# Altium PCB pcb_key.PcbDoc
Units mm, origin at the board's own origin, x right, y up, seen from the top; angles counter-clockwise.
Board outline 78 x 53 mm, 4 copper layers (Top Layer, Int1 (GND), Int2 (PWR), Bottom Layer), stack 1.585 mm thick; 55 components, 81 nets, 219 pads, 82 vias.
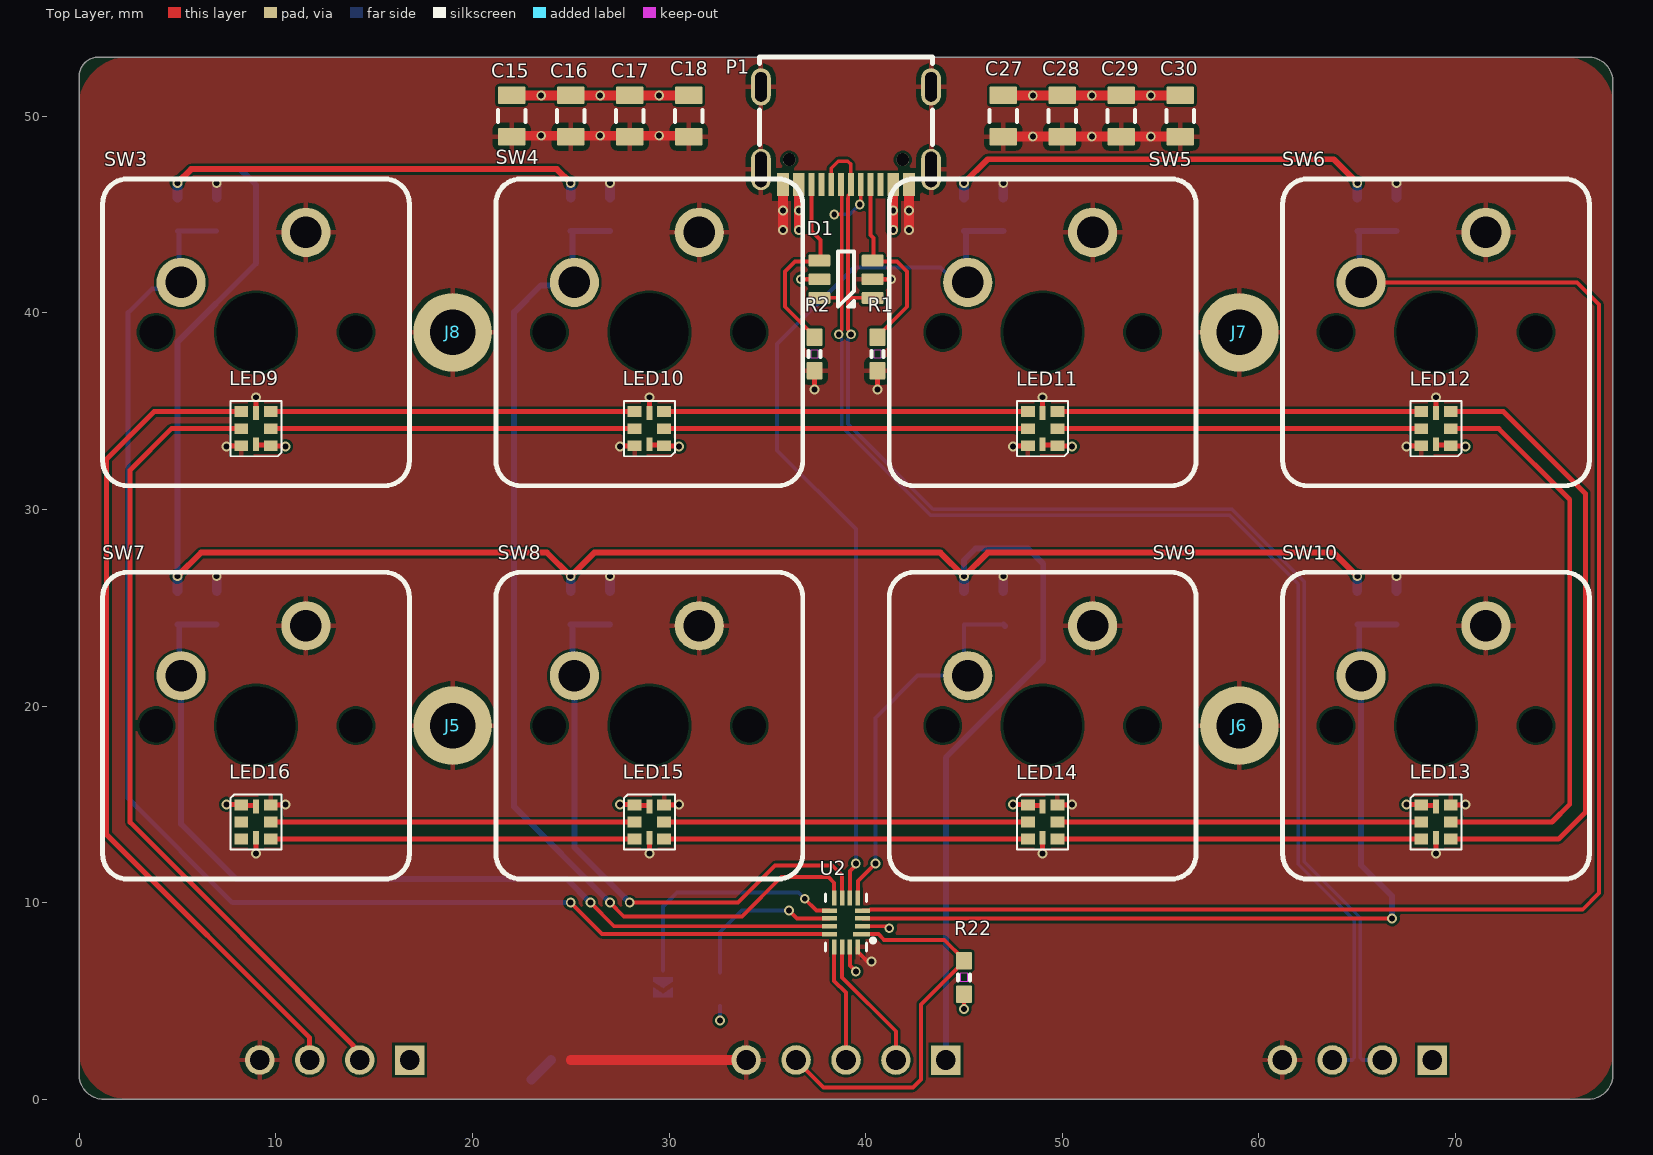
[diagram p0: Top Layer view]
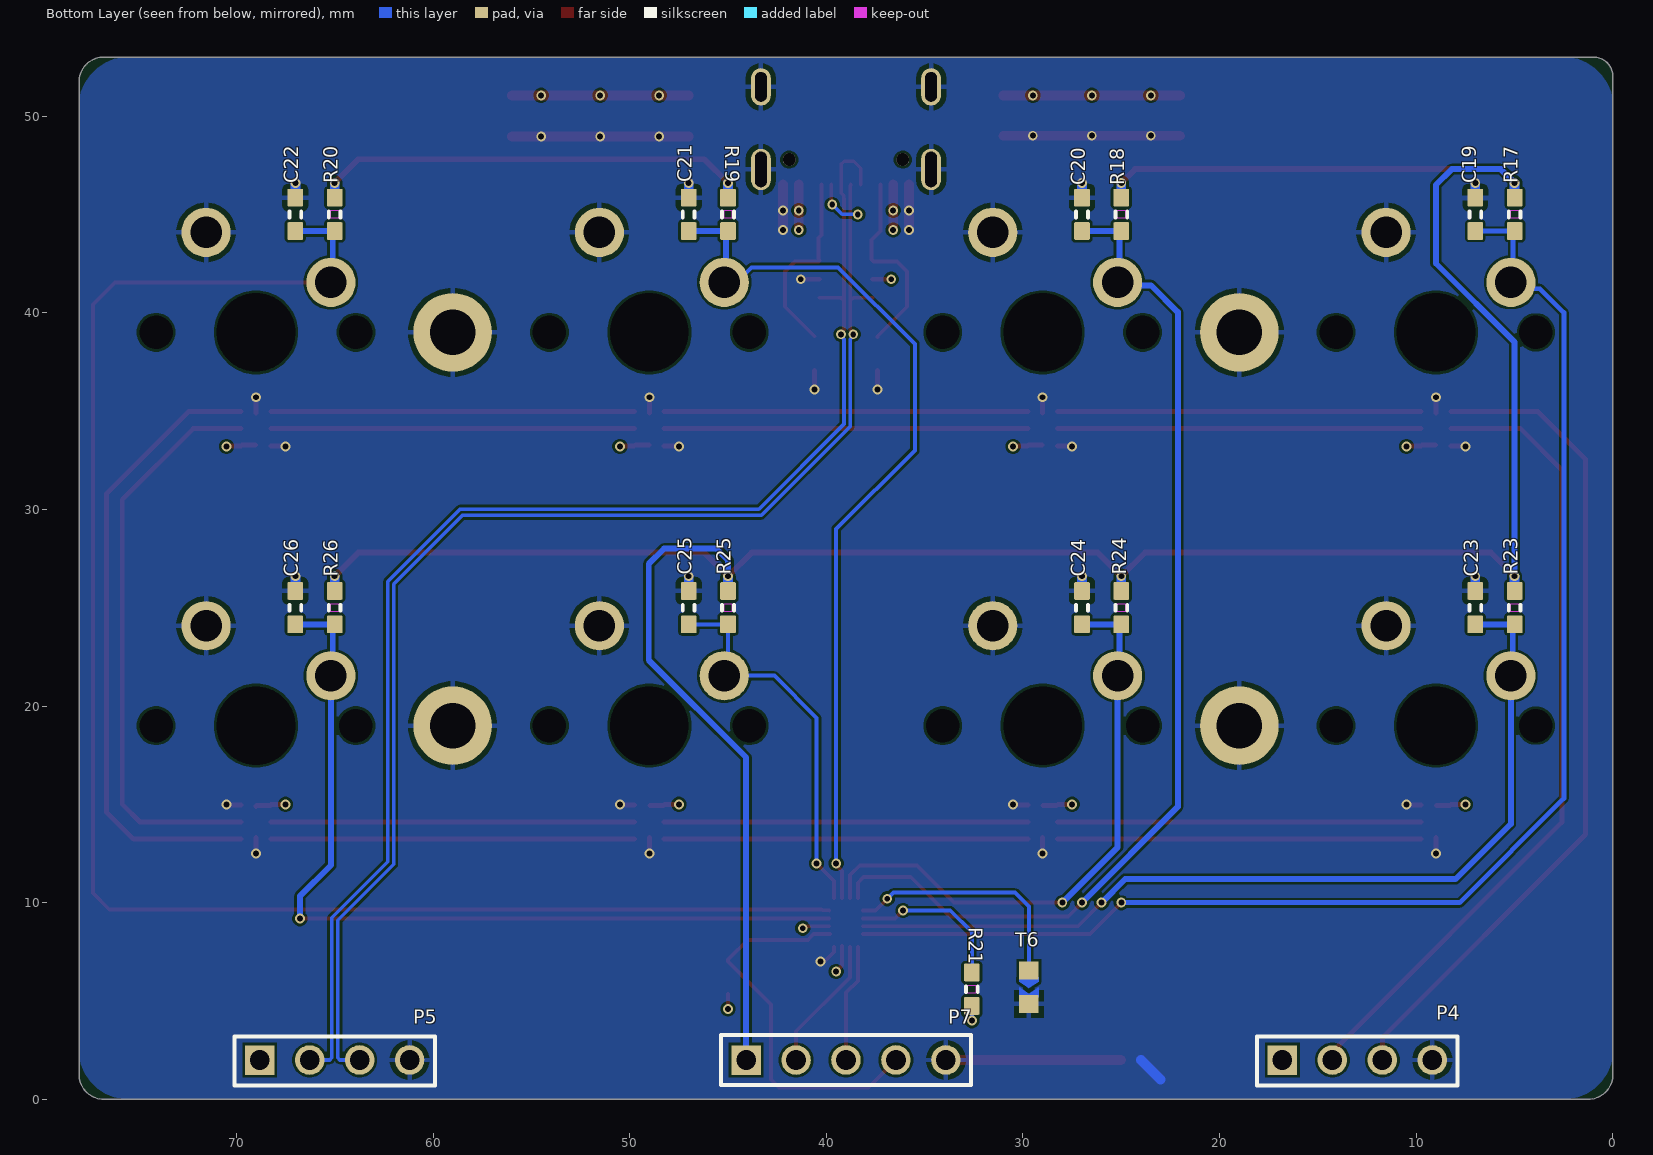
[diagram p1: Bottom Layer view, seen from below]
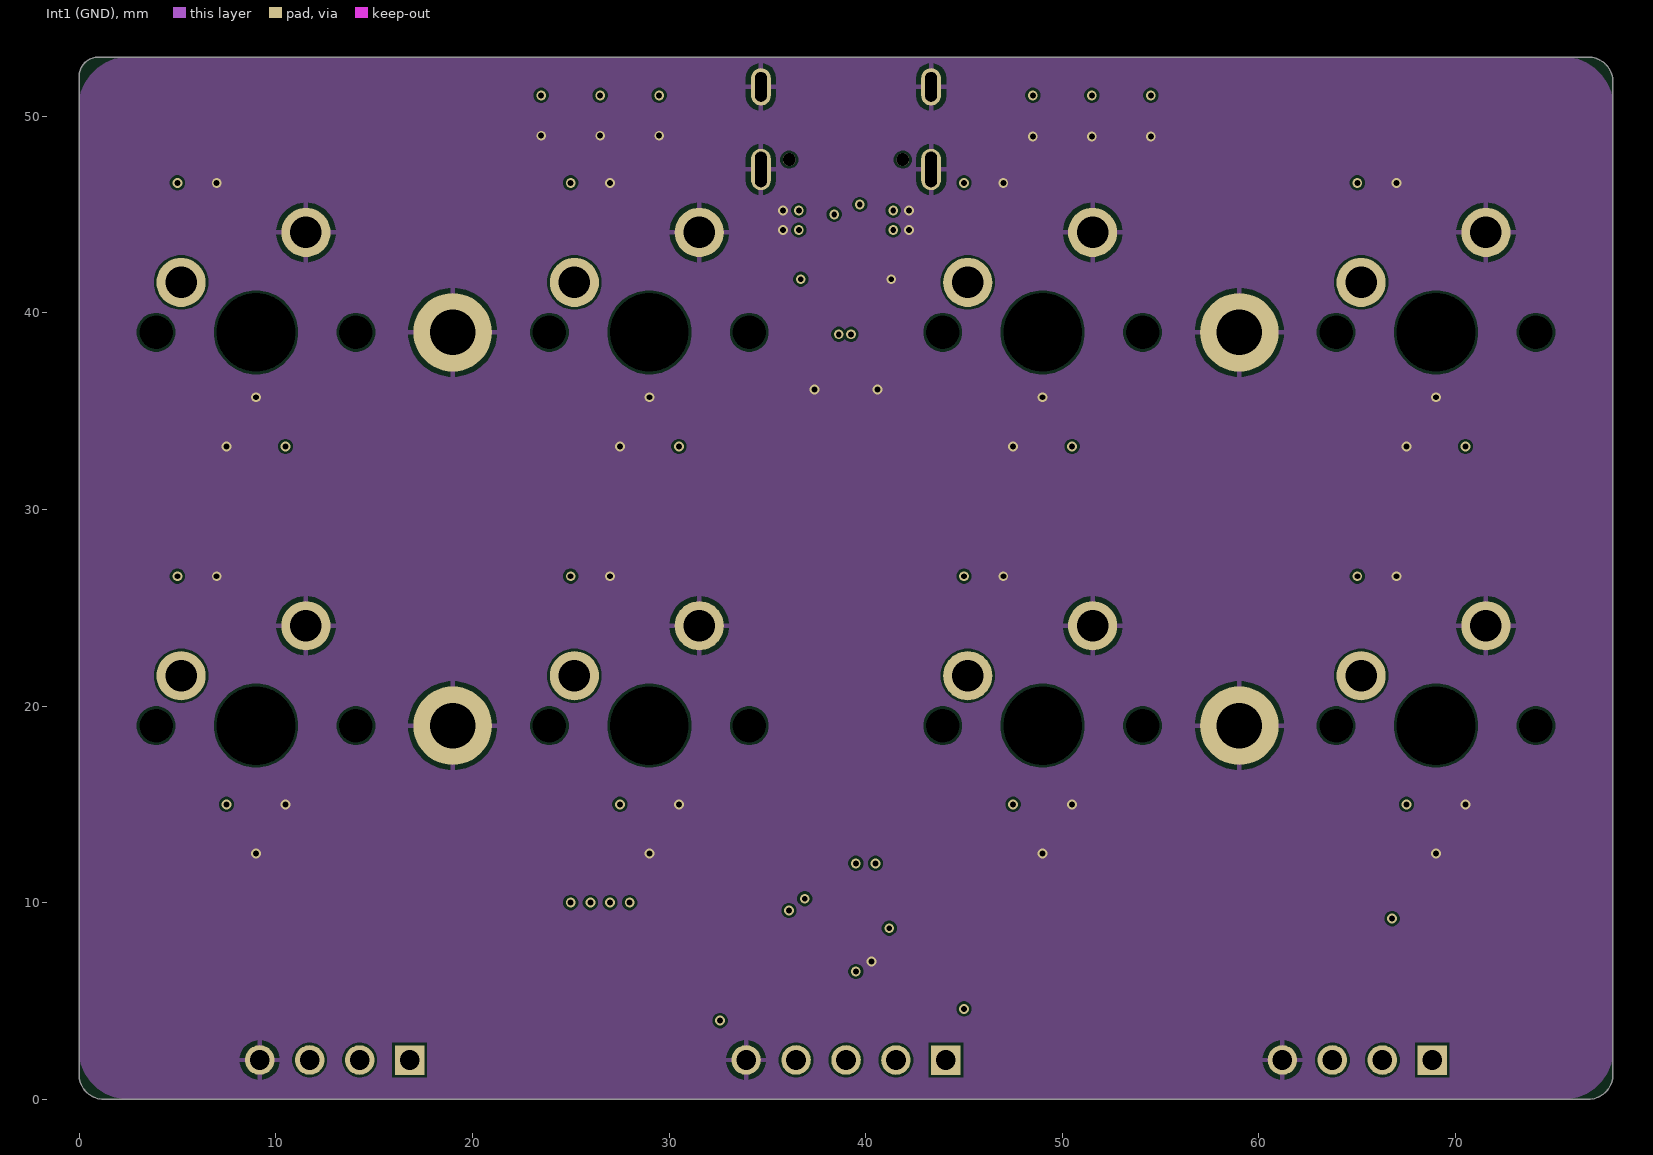
[diagram p2: Int1 (GND)]
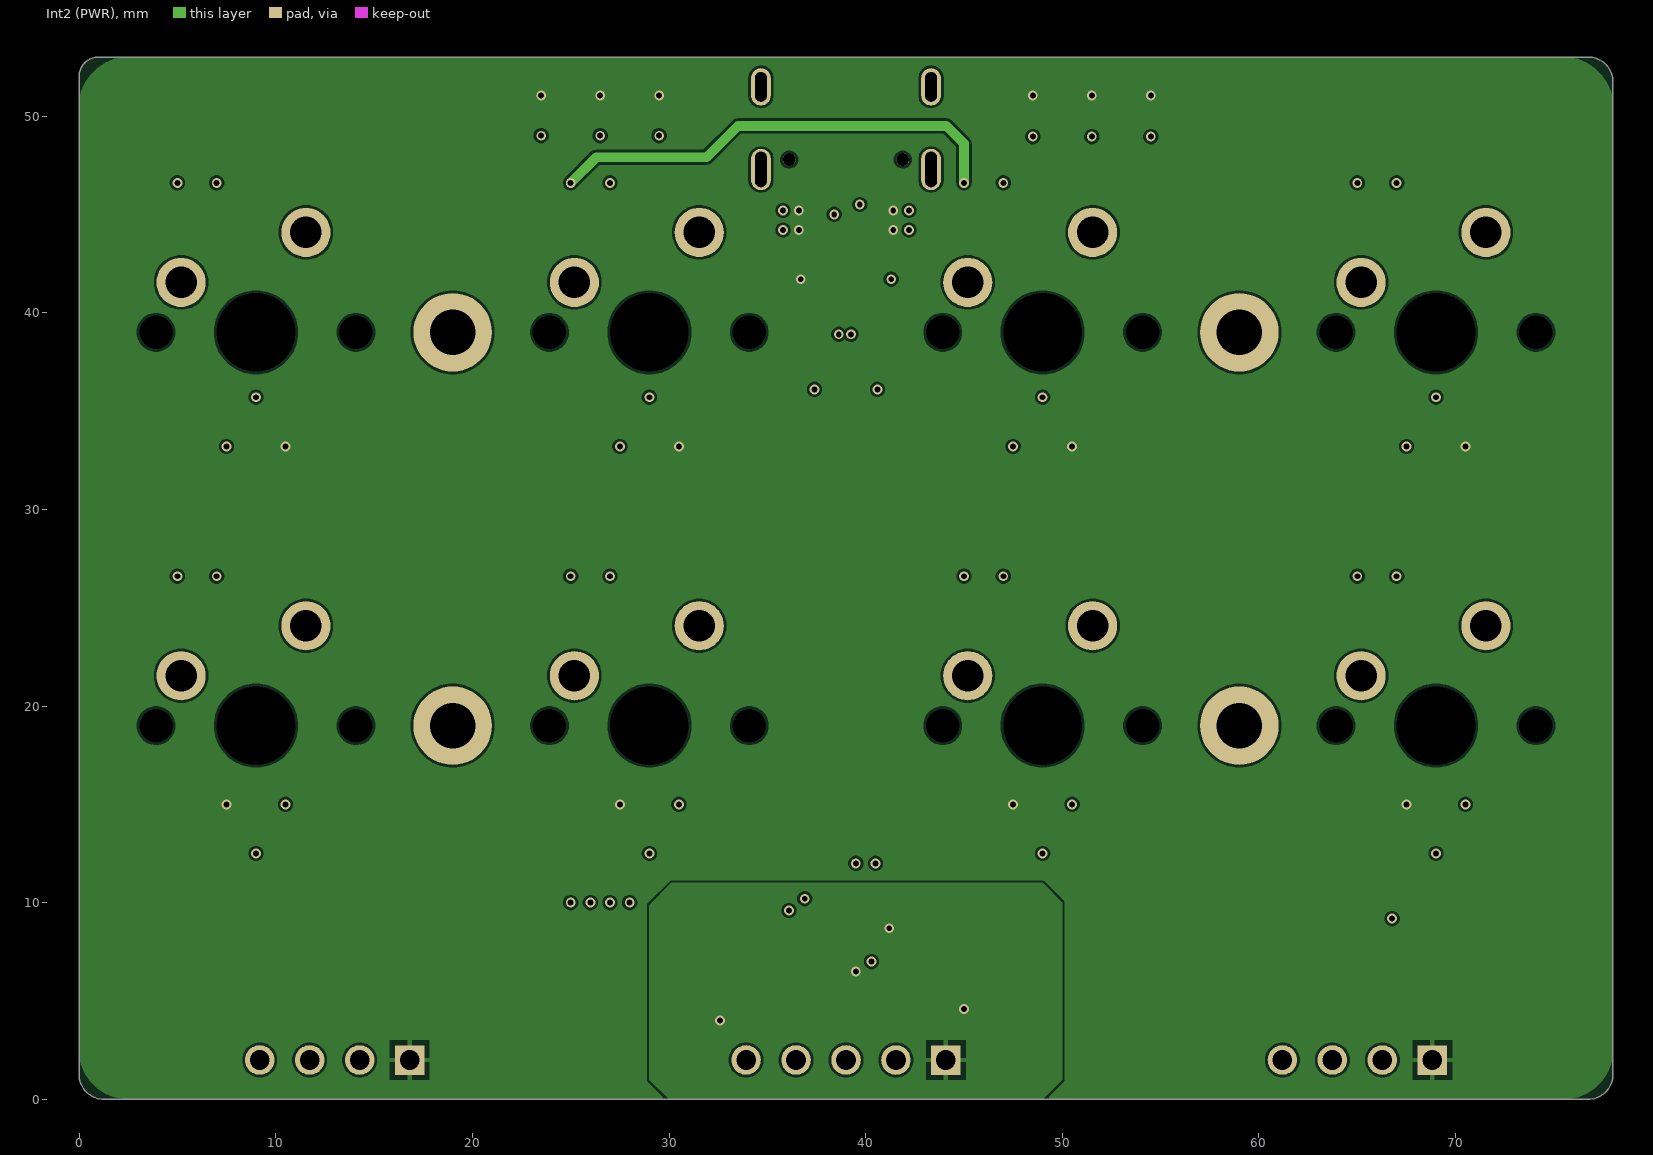
[diagram p3: Int2 (PWR)]
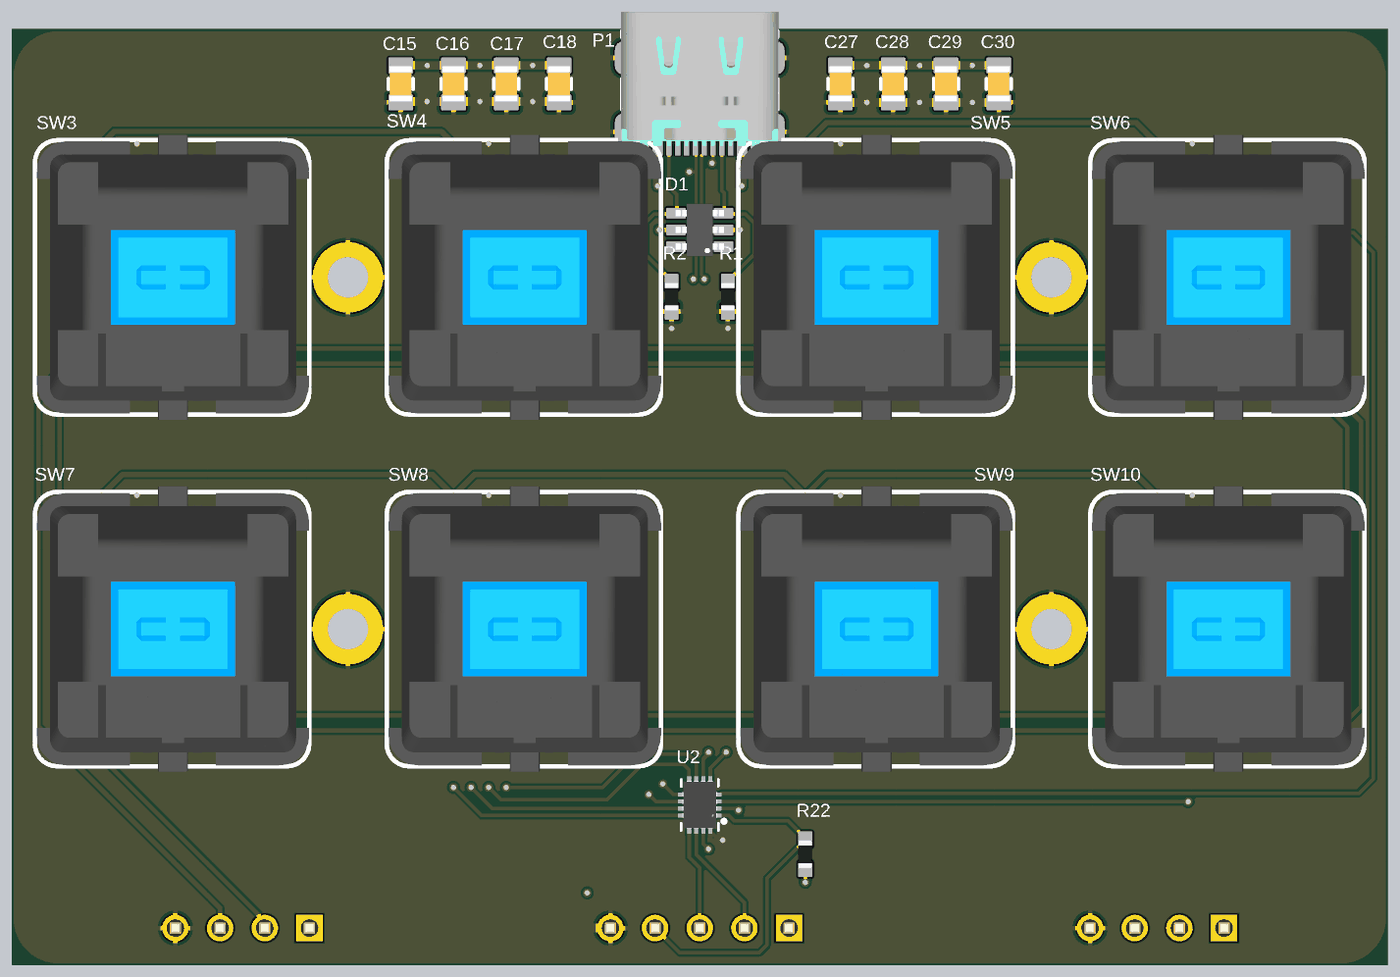
[diagram p4: 3D render of the assembled board from above, using the file's embedded part models]
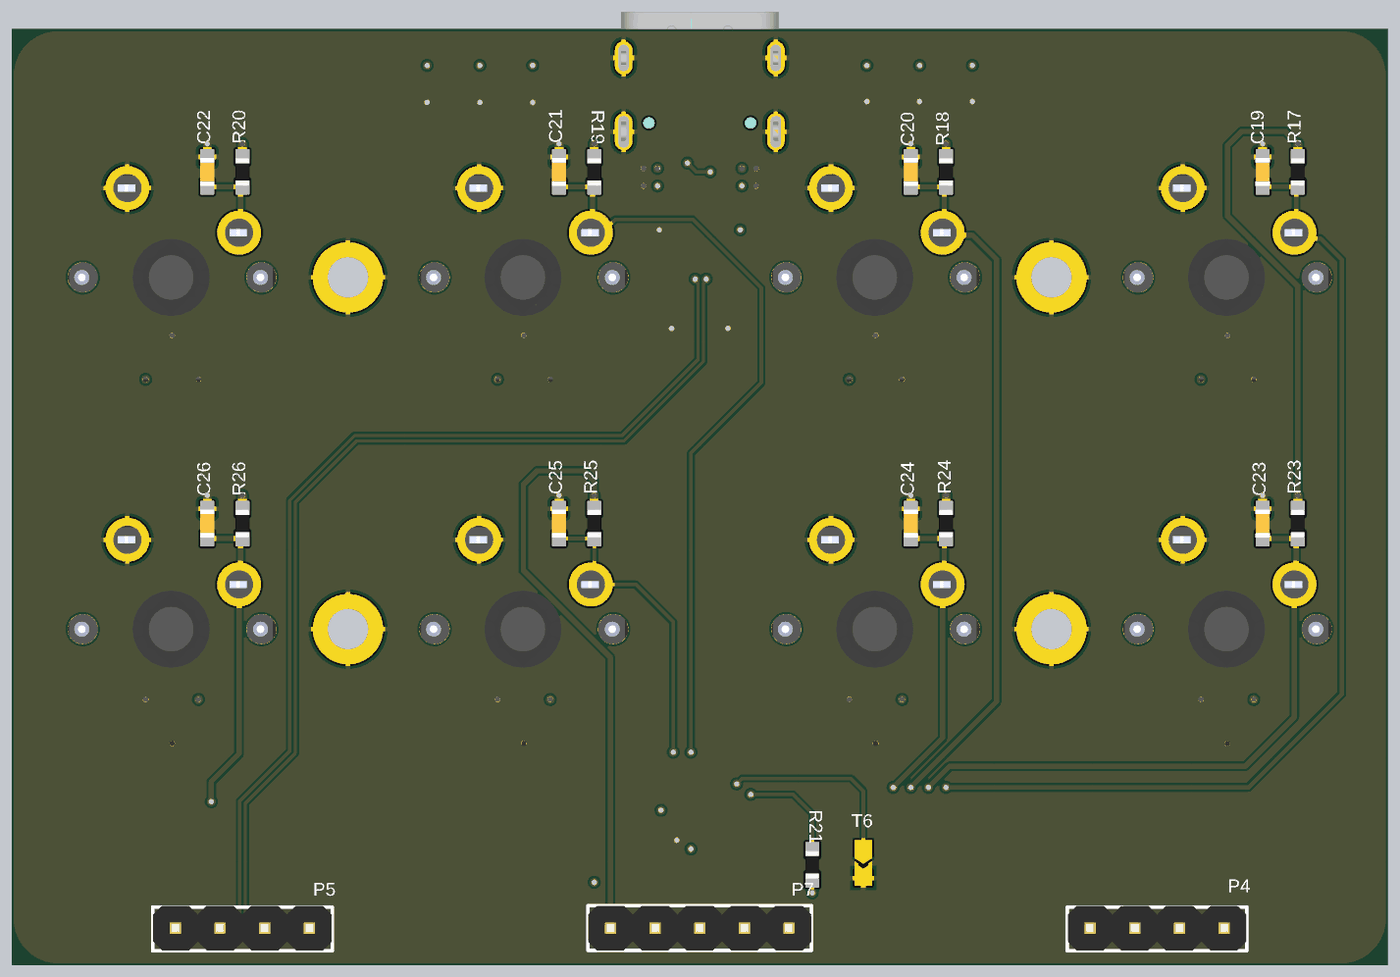
[diagram p5: 3D render of the assembled board from below, using the file's embedded part models]

## Layer stack, top to bottom
Top Solder: solder mask 0.035, SM-001, Dk 4
Top Layer: signal copper 0.035
Dielectric 2: prepreg 0.21, PP-017, Dk 4.6
Int1 (GND): signal copper 0.015
Dielectric 3: core 1.065, Core-039, Dk 4.6
Int2 (PWR): signal copper 0.015
Dielectric 4: prepreg 0.21, PP-017, Dk 4.6
Bottom Layer: signal copper 0.035
Bottom Solder: solder mask 0.035, SM-001, Dk 4

## Board outline
0,1.27 0,52 cw(c1,52) 1,53 76.73,53 cw(c76.73,51.73) 78,51.73 78,45 78,13 78,1.27 cw(c76.73,1.27) 76.73,0 1.27,0 cw(c1.27,1.27)

## Design rules (kind name [scope] priority, off if disabled: settings)
Clearance Clearance_Power [InNetClass('Power')] p1: gap=0.3 ignorepadtopadclearanceinfootprint=FALSE except(0.127: SMDPad-SMDPad SMDPad-THPad SMDPad-Via SMDPad-Fill SMDPad-Poly SMDPad-Region SMDPad-Text SMDPad-Hole THPad-THPad THPad-Via THPad-Fill THPad-Poly THPad-Region THPad-Text THPad-Hole)
Clearance Clearance_signal [All] p2: gap=0.125 ignorepadtopadclearanceinfootprint=FALSE
ComponentClearance [All] p1 off: gap=0.254 collisioncheckmode=3 verticalgap=0.254 showdistances=FALSE
DiffPairsRouting [InDifferentialPair('USB')] p1: maxlimit=0.254 minlimit=0.127 mostfreqgap=0.254 toplayer_maxgap=0.127 toplayer_prefgap=0.127 toplayer_minwidth=0.182 toplayer_maxwidth=0.182 toplayer_prefwidth=0.182 bottomlayer_maxgap=0.127 bottomlayer_prefgap=0.127 bottomlayer_minwidth=0.182 bottomlayer_maxwidth=0.182 bottomlayer_prefwidth=0.182 impedanceprofiledriven=TRUE impedanceprofileid={FA6609CF-BA32-4F74-B84B-CE5609EF71AF} impedanceprofilevalue=90.000000 maxuncoupledlength=12.7
HoleSize [All] p1 off: absolutevalues=TRUE maxlimit=2.54 minlimit=0.025 maxpercent=80.000 minpercent=20.000
MinimumSolderMaskSliver [All] p1 off: minsoldermaskwidth=0.254
PasteMaskExpansion [All] p1 off: expansion=0
PolygonConnect PolygonConnect_Power [InNetClass('Power')] p1: connectstyle=Direct reliefconductorwidth=0.254 reliefentries=4 polygonreliefangle="90 Angle" airgapwidth=0.254
PolygonConnect [All] p2: thpad.connectstyle=Relief thpad.reliefconductorwidth=0.254 thpad.reliefentries=4 thpad.polygonreliefangle="90 Angle" thpad.airgapwidth=0.254 smdpad.connectstyle=Relief smdpad.reliefconductorwidth=0.254 smdpad.reliefentries=4 smdpad.polygonreliefangle="90 Angle" smdpad.airgapwidth=0.254 via.connectstyle=Direct via.reliefconductorwidth=0.254 via.reliefentries=4 via.polygonreliefangle="90 Angle" via.airgapwidth=0.254
RoutingVias [All] p1: holewidth=0.3 width=0.5 viastyle="Through Hole" minholewidth=0.15 minwidth=0.25 maxholewidth=1 maxwidth=1.3
SilkToSolderMaskClearance [IsPad] p1 off: minsilkscreentomaskgap=0.254 clearancetoexposedcopper=TRUE
SolderMaskExpansion [All] p1 off: expansion=0.102 istentingtop=FALSE
Width Width_Power(5A) [InNetClass('Power')] p1: maxlimit=2 minlimit=0.5 preferedwidth=1.25 minimp=50.000000 maximp=50.000000 favimp=50.000000
Width Width_signal [All] p2: maxlimit=1 minlimit=0.1 preferedwidth=0.2 minimp=50.000000 maximp=50.000000 favimp=50.000000
24 further rules are at their usual default settings.

## Classes and differential pairs
differential pair class USB: USB USB-ESP
component class CherryMX: C19 C20 C21 C22 C23 C24 C25 C26 J5 J6 J7 J8 LED9 LED10 LED11 LED12 LED13 LED14 LED15 LED16 P4 P7 R17 R18 R19 R20 R21 R22 R23 R24 R25 R26 SW3 SW4 SW5 SW6 SW7 SW8 SW9 SW10 T6 U2
component class MCU: C15 C16 C17 C18 C27 C28 C29 C30 D1 P1 P5 R1 R2
differential pair USB: +USB_P -USB_N
differential pair USB-ESP: +USB-ESP_P -USB-ESP_N

## Components (designator, comment, footprint, x,y, rotation, side; value= is the part's Value field where it differs from the comment)
C15 "Capacitor-0805-22uF-16V-X5R" CAPACITOR-0805 22,50 r90 top value=22uF
C16 "Capacitor-0805-22uF-16V-X5R" CAPACITOR-0805 25,50 r90 top value=22uF
C17 "Capacitor-0805-22uF-16V-X5R" CAPACITOR-0805 28,50 r90 top value=22uF
C18 "Capacitor-0805-22uF-16V-X5R" CAPACITOR-0805 31,50 r90 top value=22uF
C19 "Capacitor-0603-0.1uF-50V-X7R" CAPACITOR-0603 7,45 r270 bottom value=0.1uF
C20 "Capacitor-0603-0.1uF-50V-X7R" CAPACITOR-0603 27,45 r270 bottom value=0.1uF
C21 "Capacitor-0603-0.1uF-50V-X7R" CAPACITOR-0603 47,45 r270 bottom value=0.1uF
C22 "Capacitor-0603-0.1uF-50V-X7R" CAPACITOR-0603 67,45 r270 bottom value=0.1uF
C23 "Capacitor-0603-0.1uF-50V-X7R" CAPACITOR-0603 7,25 r270 bottom value=0.1uF
C24 "Capacitor-0603-0.1uF-50V-X7R" CAPACITOR-0603 27,25 r270 bottom value=0.1uF
C25 "Capacitor-0603-0.1uF-50V-X7R" CAPACITOR-0603 47,25 r270 bottom value=0.1uF
C26 "Capacitor-0603-0.1uF-50V-X7R" CAPACITOR-0603 67,25 r270 bottom value=0.1uF
C27 "Capacitor-0805-22uF-16V-X5R" CAPACITOR-0805 47,50 r90 top value=22uF
C28 "Capacitor-0805-22uF-16V-X5R" CAPACITOR-0805 50,50 r90 top value=22uF
C29 "Capacitor-0805-22uF-16V-X5R" CAPACITOR-0805 53,50 r90 top value=22uF
C30 "Capacitor-0805-22uF-16V-X5R" CAPACITOR-0805 56,50 r90 top value=22uF
D1 "NUP4301MR6T1G" SOT-23-6 39,41.7 r90 top
J5 "hole" HOLE-M2-Bolt 19,19 r0 top
J6 "hole" HOLE-M2-Bolt 59,19 r0 top
J7 "hole" HOLE-M2-Bolt 59,39 r0 top
J8 "hole" HOLE-M2-Bolt 19,39 r0 top
LED9 "DotStar Micro" LED_DOTSTAR 9,34.1 r180 top
LED10 "DotStar Micro" LED_DOTSTAR 29,34.1 r180 top
LED11 "DotStar Micro" LED_DOTSTAR 49,34.1 r180 top
LED12 "DotStar Micro" LED_DOTSTAR 69,34.1 r180 top
LED13 "DotStar Micro" LED_DOTSTAR 69,14.1 r0 top
LED14 "DotStar Micro" LED_DOTSTAR 49,14.1 r0 top
LED15 "DotStar Micro" LED_DOTSTAR 29,14.1 r0 top
LED16 "DotStar Micro" LED_DOTSTAR 9,14.1 r0 top
P1 "USB4105-GF-A" USB-C 39,49 r180 top
P4 "4pos-TH-2.54mm" HDR1X4 13,2 r180 bottom
P5 "4pos-TH-2.54mm" HDR1X4 65,2 r180 bottom
P7 "5pos-TH-2.54mm" HDR1X5 44.08,2 r180 bottom
R1 "Resistor-0603-5.1k" RESISTOR-0603 40.6,37.9 r90 top value=5.1k
R2 "Resistor-0603-5.1k" RESISTOR-0603 37.4,37.9 r90 top value=5.1k
R17 "SMT resistor" Resistor-0603 5,45 r90 bottom value=10k
R18 "SMT resistor" Resistor-0603 25,45 r90 bottom value=10k
R19 "SMT resistor" Resistor-0603 45,45 r90 bottom value=10k
R20 "SMT resistor" Resistor-0603 65,45 r90 bottom value=10k
R21 "SMT resistor" Resistor-0603 32.6,5.6 r270 bottom value=10k
R22 "SMT resistor" Resistor-0603 45,6.2 r270 top value=10k
R23 "SMT resistor" Resistor-0603 5,25 r90 bottom value=10k
R24 "SMT resistor" Resistor-0603 25,25 r90 bottom value=10k
R25 "SMT resistor" Resistor-0603 45,25 r90 bottom value=10k
R26 "SMT resistor" Resistor-0603 65,25 r90 bottom value=10k
SW3 "MX1A-C1NW" MX2A-G1NB 9,39 r0 top locked
SW4 "MX1A-C1NW" MX2A-G1NB 29,39 r0 top locked
SW5 "MX1A-C1NW" MX2A-G1NB 49,39 r0 top locked
SW6 "MX1A-C1NW" MX2A-G1NB 69,39 r0 top locked
SW7 "MX1A-C1NW" MX2A-G1NB 9,19 r0 top locked
SW8 "MX1A-C1NW" MX2A-G1NB 29,19 r0 top locked
SW9 "MX1A-C1NW" MX2A-G1NB 49,19 r0 top locked
SW10 "MX1A-C1NW" MX2A-G1NB 69,19 r0 top locked
T6 "NetTie_0603" NetTie-0603-short 29.7,5.7 r90 bottom
U2 "PI4IOE5V6408ZTAEX" UQFN-16 39,9 r180 top

## Footprints (in the part's own frame and the unit in brackets; to place one, negate y for a bottom-side part, rotate by r counter-clockwise, add the part's x,y. Pads: shape width x height; smd on the part's side, far side on the other; paste and mask are expansions set on the pad)
CAPACITOR-0603 [mm] "Metric 1608, EIA 0603. Per Yageo Product Specification V2.2"
  rrect15% 0.9x0.8 smd: 1(-0.85,0) 2(0.85,0)
  Top Layer pour cut-out: -0.2,0.2 0.2,0.2 0.2,-0.2 -0.2,-0.2
  silkscreen extent -0.15,-0.3 0.15,0.3, body extent -0.93,-0.41 0.93,0.41, height 0.81
CAPACITOR-0805 [mm] "Metric 2012, EIA 0805, Per Yageo Product Specification V2.2"
  rrect15% 0.9x1.4 smd: 1(-1.05,0) 2(1.05,0)
  silkscreen extent -0.3,-0.7 0.3,0.7, body extent -1.09,-0.64 1.09,0.64, height 1.26
HDR1X4 [mm] "Connector; Header; 2 Position"
  rect 1.5x1.5 hole 1: 1(-3.81,0)
  round 1.5 hole 1: 2(-1.27,0) 3(1.27,0) 4(3.81,0)
  silkscreen extent -5.1,-1.3 5.1,1.2, body extent -5.08,-1.27 5.08,1.27, height 8.54
HDR1X5 [mm] "Connector; Header; 2 Position"
  rect 1.5x1.5 hole 1: 1(0,0)
  round 1.5 hole 1: 2(2.54,0) 3(5.08,0) 4(7.62,0) 5(10.16,0)
  silkscreen extent -1.27,-1.27 11.43,1.27, body extent -1.27,-1.27 11.43,1.27, height 8.54
HOLE-M2-Bolt [mm] "Hole M2 Bolt"
  round 4 hole 2.3: 1(0,0)
LED_DOTSTAR [mm] "DotStar Micro LEDs"
  rect 0.7x0.55 smd: 1(-0.75,0.87) 3(0.75,0.87) 4(0.75,0) 5(0.75,-0.87) 7(-0.75,-0.87) 8(-0.75,0)
  rect 0.3x0.7 smd: 2(0,0.795) 6(0,-0.795)
  silkscreen extent -1.3,-1.4 1.3,1.4, body extent -1,-1 1,1, height 0.75
MX2A-G1NB [mm] "Cherry MX Brown"
  round 2.5 hole 1.6: 1(-3.81,2.54) 2(2.54,5.08)
  round 0 hole 1.7: ""(-5.08,0) ""(5.08,0)
  round 0 hole 4: ""(0,0)
  silkscreen extent -7.8,-7.8 7.8,7.8, body extent -7.69,-8.1 7.8,8.09, height 15.24
NetTie-0603-short [mm] "Net Tie with an EIA 0603 land pattern"
  rect 0.9x1 smd paste-1 mask+0.102: 1(-0.85,0) 2(0.85,0)
  Top Layer region: -0.5,0.5 0,0.5 -0.125,0.3 -0.325,0 -0.125,-0.3 0,-0.5 -0.5,-0.5
  Top Layer region: 0.5,0.5 0.275,0.5 0.15,0.3 -0.05,0 0.15,-0.3 0.275,-0.5 0.5,-0.5
RESISTOR-0603 [mm] "Metric 1608, EIA 0603 Drawn per Yageo \"Chip resistors Mounting\" rev 10"
  rrect15% 0.9x0.8 smd: 1(-0.85,0) 2(0.85,0)
  Top Layer pour cut-out: -0.2,0.2 0.2,0.2 0.2,-0.2 -0.2,-0.2
  Top Layer keep-out region: -0.2,-0.2 0.2,-0.2 0.2,0.2 -0.2,0.2
  silkscreen extent -0.15,-0.3 0.15,0.3, body extent -0.8,-0.4 0.8,0.4, height 0.55
Resistor-0603 [mm] "Metric 1608, EIA 0603 Drawn per Yageo \"Chip resistors Mounting\" rev 10"
  rrect15% 0.9x0.8 smd: 1(-0.85,0) 2(0.85,0)
  Top Layer pour cut-out: -0.2,0.2 0.2,0.2 0.2,-0.2 -0.2,-0.2
  Top Layer keep-out region: -0.2,0.2 0.2,0.2 0.2,-0.2 -0.2,-0.2
  silkscreen extent -0.15,-0.3 0.15,0.3, body extent -0.8,-0.4 0.8,0.4, height 0.55
SOT-23-6 [mm] "SOT23-6, from TI DDC (R-PDSO-G6)"
  rrect15% 0.6x1.1 smd: 1(-0.95,-1.35) 2(0,-1.35) 3(0.95,-1.35) 4(0.95,1.35) 5(0,1.35) 6(-0.95,1.35)
  silkscreen extent -1.4,-0.4 1.4,0.4, body extent -1.5,-1.37 1.5,1.38, height 1.1
UQFN-16 [mil]
  rect 34x9 smd paste+0 mask+0: 1(-31.5,23.62)
  rect 30x9 smd paste+0 mask+0: 2(-33.5,7.87) 3(-33.5,-7.87) 4(-33.5,-23.62) 9(33.5,-23.62) 10(33.5,-7.87) 11(33.5,7.87) 12(33.5,23.62)
  rect 9x30 smd paste+0 mask+0: 5(-23.62,-49) 6(-7.87,-49) 7(7.87,-49) 8(23.62,-49) 13(23.62,49) 14(7.87,49) 15(-7.87,49) 16(-23.62,49)
  silkscreen extent -58,-57 42,57, body extent -39,-54 39,54, height 22
USB-C [mm]
  oval 1x1.9 hole 0.6 slot 1.5 at 90 deg: 13(-4.325,-2.481) 13(4.325,-2.481)
  oval 1x2.1 hole 0.6 slot 1.8 at 90 deg: 13(-4.325,1.719) 13(4.325,1.719)
  rect 0.6x1.15 smd mask+0.08: A1B12(-3.2,2.481) A4B9(-2.4,2.481) B1A12(3.2,2.481) B4A9(2.4,2.481)
  rect 0.3x1.15 smd mask+0.08: A5(-1.25,2.481) A6(-0.25,2.481) A7(0.25,2.481) A8(1.25,2.481) B5(1.75,2.481) B6(0.75,2.481) B7(-0.75,2.481) B8(-1.75,2.481)
  round 0.65 hole 0.65 unplated: ""(-2.89,1.219) ""(2.89,1.219)
  silkscreen extent -4.4,-4 4.4,0.44, body extent -4.47,-5.08 4.47,2.52, height 3.28

## Part data
C15 C16 C17 C18 C27 C28 C29 C30: Package / Case="Metric 2012 , EIA 0805", Supplier Part Number 1=1276-6780-1-ND, Volt=16V, Mounted=Yes, Precision=X5R-10%, Supplier 1=Digi-Key, Supplier 2=Digi-Key, Supplier 3=Digi-Key, Supplier 4=Digi-Key
C19 C20 C21 C22 C23 C24 C25 C26: Package / Case="Metric 1608, EIA 0603", Supplier Part Number 1=1276-1935-2-ND, Volt=50V, Mounted=Yes, Precision=X7R-10%, Supplier 1=Digi-Key, Supplier 2=Digi-Key, Supplier Part Number 2=1276-1934-2-ND
D1: "4CH Clamp Ipp Tvs Diode Surface Mount SOT23-6 (SC74)", Package / Case=SOT23-6, Supplier Part Number 1=NUP4301MR6T1GOSTR-ND, Volt=70, Mounted=Yes, Supplier 1=Digi-Key
J5 J6 J7 J8: library part "Hole 2.3mm M2", "Hole for M2 Bolt with 4mm pad", Mounted=N/A
LED9 LED10 LED11 LED12 LED13 LED14 LED15 LED16: "Addressable Lighting - 10 LED Discrete Serial (Shift Register) Red, Green, Blue (RGB) 2.00mm L x 2.00mm W", Package / Case=4-SMD, Supplier Part Number 1=1528-1826-ND, Mounted=Yes, Supplier 1=Digi-Key
P1: "CONN RCP USB2.0 TYP C 24P SMD RA / 5A", Package / Case=SMD, Supplier Part Number 1=2073-USB4105-GF-ACT-ND, Volt=N/A, Mounted=Yes, Supplier 1=Digikey
P4 P5: "4pos TH 2.54mm Header", Package / Case=TH, Supplier Part Number 1=N/A, Mounted=Yes, Supplier 1=Digi-Key, Volt=N/A
P7: "5pos TH 2.54mm Header", Package / Case=TH, Supplier Part Number 1=N/A, Mounted=Yes, Supplier 1=Digi-Key, Volt=N/A
R1 R2: library part Resistor-0603-DNI, "0603 footprint DO NOT INSTALL", Package/Case="Metric 1608 , EIA 0603", Mounted=Yes
R17 R18 R19 R20 R21 R22 R23 R24 R25 R26: library part Resistor0603-10k, "Resistor0603-10k", Package / Case="Metric 1608, EIA 0603", Supplier Part Number 1=311-10.0KHRTR-ND, Mounted=Yes, Precision=1%, Supplier 1=Digi-Key, Supplier 2=Digi-Key, Supplier 3=Digi-Key, Supplier 4=Digi-Key, Supplier Part Number 2=RMCF0603FT10K0TR-ND, Watt=0.1W
SW3 SW4 SW5 SW6 SW7 SW8 SW9 SW10: "Pushbutton Switch SPST-NO Keyswitch Through Hole", Current=0.05A, Supplier Part Number 1=CH310-ND, Volt=5V, Mounted=Yes, Supplier 1=Digi-Key
U2: "I/O Expander 8 I2C 1 MHz 16-UQFN (1.8x2.6)", Package / Case=16-UQFN, Supplier Part Number 1=PI4IOE5V6408ZTAEXDICT-ND, HelpURL=https://www.diodes.com/assets/Datasheets/PI4IOE5V6408.pdf, Mounted=Yes, Supplier 1=Digikey

## Via types
v1: diameter 0.5, hole 0.3, Top Layer to Bottom Layer, tented both sides, 82 vias

## Nets (pads, with @x,y where several pads share a name; then routed paths per layer and width w, separated by ;. In a path a pad name is that pad's centre, name@x,y a point inside that pad or via, vN(x,y) a via of type N, cw(c..) or ccw(c..) an arc to the next point about the centre after c; other vN are vias at no path point)
3V3: 
3V3_SW: P7.1 R17.2 R18.2 R19.2 R20.2 R21.2 R22.2 R23.2 R24.2 R25.2 R26.2 U2.2 U2.15 | length 197.3
  Top Layer w0.2: U2.15@39.2,7.8 U2.15 39.2,6.8 v1(39.5,6.5) ; U2.2 41.019,8.8 41.119,8.7 v1(41.2,8.7) ; v1(45,4.6) R22.2
  Top Layer w0.3: v1(5,26.6) 6.2,27.8 23.8,27.8 v1(25,26.6) 26.2,27.8 43.8,27.8 v1(45,26.6) 46.2,27.8 63.8,27.8 v1(65,26.6) ; v1(5,46.6) 5.7,47.3 24.3,47.3 v1(25,46.6) ; v1(45,46.6) 46.2,47.8 63.8,47.8 v1(65,46.6)
  Int2 (PWR) w0.5: v1(25,46.6) 26.3,47.9 31.9,47.9 33.5,49.5 44.1,49.5 45,48.6 v1(45,46.6)
  Bottom Layer w0.2: v1(32.6,4) 32.6,4.1 R21.2
  Bottom Layer w0.3: v1(5,26.6) 5,38.5 9,42.5 9,46.5 8.2,47.3 5.7,47.3 v1(5,46.6) ; P7.1 44.08,17.38 49.029,22.329 49.029,27.227 48.256,28 45.589,28 45,27.411 v1(45,26.6)
  Bottom Layer w0.5: R23.2 v1(5,26.6) ; R17.2 v1(5,46.6) ; R24.2 v1(25,26.6) ; R18.2 v1(25,46.6) ; R25.2 v1(45,26.6) ; R19.2 v1(45,46.6) ; R26.2 v1(65,26.6) ; R20.2 v1(65,46.6)
5V: 
5V_USB: C15.2 C16.2 C17.2 C18.2 C27.2 C28.2 C29.2 C30.2 D1.5 LED9.1 LED9.2 LED10.1 LED10.2 LED11.1 LED11.2 LED12.1 LED12.2 LED13.1 LED13.2 LED14.1 LED14.2 LED15.1 LED15.2 LED16.1 LED16.2 P1.A4B9 P1.B4A9 P4.1 P5.1 | length 35
  Top Layer w0.25: v1@7.515,14.985 LED16.1@8.235,14.985 ; LED16.1@8.287,14.932 LED16.2@8.975,14.932 ; LED9.2@9.025,33.268 LED9.1@9.713,33.268 ; LED9.1@9.765,33.215 v1@10.485,33.215 ; v1@27.515,14.985 LED15.1@28.235,14.985 ; LED15.1@28.287,14.932 LED15.2@28.975,14.932 ; LED10.2@29.025,33.268 LED10.1@29.713,33.268 ; LED10.1@29.765,33.215 v1@30.485,33.215 ; v1(36.7,41.7) D1.5 ; v1@47.515,14.985 LED14.1@48.235,14.985 ; LED14.1@48.287,14.932 LED14.2@48.975,14.932 ; LED11.2@49.025,33.268 LED11.1@49.712,33.268 ; LED11.1@49.765,33.215 v1@50.485,33.215 ; v1(67.5,15) 67.515,14.985 68.235,14.985 LED13.1 68.287,14.932 68.975,14.932 69,14.908 LED13.2 ; LED12.2@69.025,33.268 LED12.1@69.712,33.268 ; LED12.1@69.765,33.215 v1@70.485,33.215
  Top Layer w0.5: C15.2 C16.2 C17.2 C18.2 ; v1(36.6,44.2) P1.B4A9 ; v1(41.4,44.2) P1.A4B9 ; C27.2 C29.2 C30.2
  other v1: 7.5,15 27.5,15 47.5,15 10.5,33.2 30.5,33.2 50.5,33.2 70.5,33.2 36.6,45.2 41.4,45.2 23.5,51.05 26.5,51.05 29.5,51.05 48.5,51.05 51.5,51.05 54.5,51.05
CC1: D1.3 P1.A5 R1.2 | length 9.8
  Top Layer w0.2: P1.A5 40.25,43.95 40.4,43.8 40.4,42.7 D1.3 ; D1.3@40.4,42.6 41.6,42.6 42.1,42.1 42.1,40.3 R1.2@40.6,38.8
CC2: D1.4 P1.B5 R2.2 | length 10
  Top Layer w0.2: P1.B5 37.25,44.15 37.7,43.7 37.7,42.7 D1.4 37.6,42.6 36.4,42.6 35.9,42.1 35.9,40.3 37.4,38.8 R2.2
CO_LED: LED12.8 LED13.4 | length 29.5
  Top Layer w0.25: LED13.4 74.9,14.1 75.8,15 75.8,30.5 72.2,34.1 LED12.8
DO_LED: LED12.7 LED13.5 | length 32.2
  Top Layer w0.25: LED13.5 75.23,13.23 76.6,14.6 76.6,30.8 72.43,34.97 LED12.7
EN: 
GND: C15.1 C16.1 C17.1 C18.1 C19.1 C20.1 C21.1 C22.1 C23.1 C24.1 C25.1 C26.1 C27.1 C28.1 C29.1 C30.1 D1.2 J5.1 J6.1 J7.1 J8.1 LED9.3 LED9.6 LED10.3 LED10.6 LED11.3 LED11.6 LED12.3 LED12.6 LED13.3 LED13.6 LED14.3 LED14.6 LED15.3 LED15.6 LED16.3 LED16.6 P1.13 P1.A1B12 P1.B1A12 P4.4 P5.4 P7.5 R1.1 R2.1 SW3.2 SW4.2 SW5.2 SW6.2 SW7.2 SW8.2 SW9.2 SW10.2 T6.1 U2.16 | length 55.5
  Top Layer w0.2: U2.16 39.6,7.489 40.089,7 v1(40.3,7)
  Top Layer w0.25: v1(7.5,33.2) 7.53,33.23 LED9.3 ; v1(9,12.5) LED16.6 ; LED9.6 v1(9,35.7) ; LED16.3 10.47,14.97 v1(10.5,15) ; v1(27.5,33.2) 27.53,33.23 LED10.3 ; v1(29,12.5) LED15.6 ; LED10.6 v1(29,35.7) ; LED15.3 30.47,14.97 v1(30.5,15) ; v1(37.4,36.1) R2.1 ; D1.2 v1(41.3,41.7) ; v1(40.6,36.1) R1.1 ; v1(47.5,33.2) 47.53,33.23 LED11.3 ; v1(49,12.5) LED14.6 ; LED11.6 v1(49,35.7) ; LED14.3 50.47,14.97 v1(50.5,15) ; v1(67.5,33.2) 67.53,33.23 LED12.3 ; v1(69,12.5) LED13.6 ; LED12.6 v1(69,35.7) ; LED13.3 70.47,14.97 v1(70.5,15)
  Top Layer w0.5: C15.1@22,49 C18.1@31,49 ; 25,2 P7.5 ; v1(35.8,44.2) P1.B1A12 ; v1(42.2,44.2) P1.A1B12 ; C27.1 C29.1 C30.1
  Bottom Layer w0.5: C23.1 v1(7,26.6) ; C19.1 v1(7,46.6) ; 23,1 24,2 ; C24.1 v1(27,26.6) ; C20.1 v1(27,46.6) ; C25.1 v1(47,26.6) ; C21.1 v1(47,46.6) ; C26.1 v1(67,26.6) ; C22.1 v1(67,46.6)
  other v1: 35.8,45.2 42.2,45.2 48.5,48.95 51.5,48.95 54.5,48.95 23.5,49 26.5,49 29.5,49
IO0: 
IO1: 
IO2: 
IO4: 
IO5: 
IO6: 
IO7: 
IO8: 
IO9: 
IO10: 
IO11: 
IO12: 
IO13: 
IO14: 
IO17: 
IO18: 
IO21: 
IO33: 
IO34: 
IO35: 
IO36: 
IO37: 
IO38: 
NetC1_2: 
NetC7_2: 
NetC8_2: 
NetLED1_4: 
NetLED2_4: 
NetLED3_4: 
NetLED4_4: 
NetLED5_4: 
NetLED6_4: 
NetLED7_4: 
NetLED9_4: LED9.4 P4.2 | length 41.4
  Top Layer w0.25: LED9.4 4.7,34.1 2.6,32 2.6,14.084 13.931,2.752 13.931,2.677 14.27,2.338 P4.2
NetLED9_5: LED9.5 P4.3 | length 42.7
  Top Layer w0.25: LED9.5 3.816,34.97 1.4,32.554 1.4,13.466 11.73,3.136 P4.3
NetLED9_7: LED9.7 LED10.5 | length 18.5
  Top Layer w0.25: LED9.7 LED10.5
NetLED9_8: LED9.8 LED10.4 | length 18.5
  Top Layer w0.25: LED9.8 LED10.4
NetLED10_7: LED10.7 LED11.5 | length 18.5
  Top Layer w0.25: LED10.7 LED11.5
NetLED10_8: LED10.8 LED11.4 | length 18.5
  Top Layer w0.25: LED10.8 LED11.4
NetLED11_7: LED11.7 LED12.5 | length 18.5
  Top Layer w0.25: LED11.7 LED12.5
NetLED11_8: LED11.8 LED12.4 | length 18.5
  Top Layer w0.25: LED11.8 LED12.4
NetLED13_7: LED13.7 LED14.5 | length 18.5
  Top Layer w0.25: LED14.5 LED13.7
NetLED13_8: LED13.8 LED14.4 | length 18.5
  Top Layer w0.25: LED14.4 LED13.8
NetLED14_7: LED14.7 LED15.5 | length 18.5
  Top Layer w0.25: LED15.5 LED14.7
NetLED14_8: LED14.8 LED15.4 | length 18.5
  Top Layer w0.25: LED15.4 LED14.8
NetLED15_7: LED15.7 LED16.5 | length 18.5
  Top Layer w0.25: LED16.5 LED15.7
NetLED15_8: LED15.8 LED16.4 | length 18.5
  Top Layer w0.25: LED16.4 LED15.8
NetP7_2: P7.2 U2.14 | length 6.9
  Top Layer w0.2: U2.14 38.8,6.2 41.54,3.46 P7.2
NetP7_3: P7.3 U2.13 | length 6
  Top Layer w0.2: U2.13 38.4,6.027 39,5.427 P7.3
NetP7_4: P7.4 R22.1 U2.1 | length 19.8
  Top Layer w0.2: P7.4 37.86,0.6 42.4,0.6 42.816,1.016 42.816,4.816 45,7 R22.1 45,7.1 43.996,8.104 40.943,8.104 40.647,8.4 U2.1
NetP8_2: 
NetP8_3: 
NetR21_1: R21.1 U2.10 | length 8.2
  Top Layer w0.2: v1(36.1,9.6) 36.5,9.2 U2.10
  Bottom Layer w0.2: R21.1 32.6,8.5 33.7,9.6 v1(36.1,9.6)
NetT3_2: 
NetT4_1: 
NetT5_1: 
NetT6_2: T6.2 U2.9 | length 12.4
  Top Layer w0.2: v1(36.9,10.2) 37.5,9.6 U2.9
  Bottom Layer w0.2: T6.2 29.7,9.8 30.408,10.508 36.592,10.508 v1(36.9,10.2)
RX0: 
SW1: C19.2 R17.1 SW3.1 U2.12 | length 71.2
  Top Layer w0.2: v1(25,10) 26.6,8.4 U2.12
  Bottom Layer w0.25: C19.2 R17.1 5.095,44.055 5.095,41.635 SW3.1 4.866,41.216 3.716,41.216 2.5,40 2.5,15.3 7.8,10 v1(25,10)
SW2: C23.2 R23.1 SW7.1 U2.11 | length 47.3
  Top Layer w0.2: v1(26,10) 27.2,8.8 U2.11
  Bottom Layer w0.3: C23.2 R23.1 5.095,24.055 5.095,21.635 SW7.1 5.19,14.01 8,11.2 24.8,11.2 v1(26,10)
SW3: C20.2 R18.1 SW4.1 U2.8 | length 53.8
  Top Layer w0.2: v1(27,10) 27.7,9.3 33.707,9.3 35.707,11.3 38.1,11.3 38.386,11.014 38.386,10.259 U2.8
  Bottom Layer w0.3: v1(27,10) 22.124,14.876 22.124,40.024 23.49,41.39 25.04,41.39 SW4.1 25.095,41.635 25.095,44.055 R18.1 C20.2
SW4: C24.2 R24.1 SW8.1 U2.7 | length 30.3
  Top Layer w0.2: v1(28,10) 33.5,10 35.4,11.9 38.3,11.9 38.8,11.4 U2.7
  Bottom Layer w0.3: C24.2 R24.1 25.095,24.055 25.095,21.635 SW8.1 25.19,12.81 v1(28,10)
SW5: C21.2 R19.1 SW5.1 U2.6 | length 46.2
  Top Layer w0.2: U2.6 39.2,11.619 39.5,11.919 v1(39.5,12)
  Bottom Layer w0.2: v1(39.5,12) 39.5,29 35.5,33 35.5,38.4 39.4,42.3 43.808,42.3 44.568,41.54 SW5.1
  Bottom Layer w0.3: SW5.1 45.095,41.635 45.095,44.055 R19.1 C21.2
SW6: C25.2 R25.1 SW9.1 U2.5 | length 19.9
  Top Layer w0.2: U2.5 39.6,11.1 v1(40.5,12)
  Bottom Layer w0.2: v1(40.5,12) 40.5,19.4 42.64,21.54 SW9.1 45,21.73 R25.1 C25.2
  Bottom Layer w0.3: C25.2 C25.2@47.095,24.055
SW7: C22.2 R20.1 SW6.1 U2.4 | length 85
  Top Layer w0.2: U2.4 39.865,9.614 40.201,9.614 40.249,9.662 76.462,9.662 77.29,10.49 77.29,40.41 76.16,41.54 SW6.1
  Bottom Layer w0.3: SW6.1 65.095,41.635 65.095,44.055 R20.1 C22.2
SW8: C26.2 R26.1 SW10.1 U2.3 | length 44.6
  Top Layer w0.2: U2.3 39.857,9.193 66.763,9.193 v1(66.769,9.187)
  Bottom Layer w0.3: v1(66.769,9.187) 66.769,10.331 65.19,11.91 SW10.1 65.095,21.635 65.095,24.055 R26.1 C26.2
TX0: 
USB-ESP_N: 
USB-ESP_P: 
USB_N: D1.6 P1.A7 P1.B7 P5.3 | length 69.6
  Top Layer w0.182: D1.6 38.641,40.75 38.791,40.6 ; v1(38.4,45) 38.791,45 ; v1(38.633,38.9) 38.633,38.986 38.791,39.144 38.791,40.6 ; P1.A7 38.791,46.477 38.791,45 ; v1(39.7,45.5) 39.75,45.55 P1.B7 ; 38.791,40.6 38.791,45
  Bottom Layer w0.182: v1(38.4,45) 39.2,45 v1(39.7,45.5) ; v1(38.633,38.9) 38.633,38.814 38.791,38.656 38.791,34.209 43.3,29.7 58.5,29.7 62,26.2 62,11.946 64.846,9.1 64.846,2.106 64.739,2 P5.3
USB_P: D1.1 P1.A6 P1.B6 P5.2 | length 69.8
  Top Layer w0.182: P1.B6 38.25,47.35 38.6,47.7 39.094,47.7 39.25,47.544 P1.A6 39.25,46.094 39.116,45.96 39.116,45.838 39.1,45.822 39.1,40.6 ; v1(39.258,38.9) 39.258,38.986 39.1,39.144 39.1,40.6 ; D1.1 39.25,40.75 39.1,40.6
  Bottom Layer w0.182: v1(39.258,38.9) 39.258,38.814 39.1,38.656 39.1,34.336 43.428,30.009 58.628,30.009 62.309,26.328 62.309,12.074 65.154,9.228 65.154,2.106 65.261,2 P5.2
pads on no net: LED16.7 LED16.8 P1. P1.A8 P1.B8 SW3. SW4. SW5. SW6. SW7. SW8. SW9. SW10.

## Polygon pours and split planes (outlines as drawn)
5V_USB on Int2 (PWR) "5V_USB_L03_P001" (solid, remove dead copper, pour order 1): 75.46,0 ccw(c75.46,2.54) 78,2.54 78,50.46 ccw(c75.46,50.46) 75.46,53 2.54,53 ccw(c2.54,50.46) 0,50.46 0,2.54 ccw(c2.54,2.54) 2.54,0 7,0
3V3_SW on Int2 (PWR) "3V3_SW_L03_P000" (solid, remove dead copper, pour order 0): 49,0 50,1 50,10 49,11 30.125,11 29,9.875 29,1 30,0
GND on Bottom Layer "GND_L04_P003" (solid, remove dead copper, pour order 3): 75.46,0 ccw(c75.46,2.54) 78,2.54 78,50.46 ccw(c75.46,50.46) 75.46,53 2.54,53 ccw(c2.54,50.46) 0,50.46 0,2.54 ccw(c2.54,2.54) 2.54,0 14,0
GND on Int1 (GND) "GND_L02_P004" (solid, remove dead copper, pour order 4): 75.46,0 ccw(c75.46,2.54) 78,2.54 78,50.46 ccw(c75.46,50.46) 75.46,53 2.54,53 ccw(c2.54,50.46) 0,50.46 0,2.54 ccw(c2.54,2.54) 2.54,0 14,0
GND on Top Layer "GND_L01_P005" (solid, remove dead copper, pour order 5): 75.46,0 ccw(c75.46,2.54) 78,2.54 78,50.46 ccw(c75.46,50.46) 75.46,53 2.54,53 ccw(c2.54,50.46) 0,50.46 0,2.54 ccw(c2.54,2.54) 2.54,0 14,0

## Silkscreen, mask and mechanical layers (free items; w line width, h text height)
Board:
  lines w0.25: 0,1.27 ccw(c1.27,1.27) 1.27,0 4,0 59,0 76,0 76.73,0 ccw(c76.73,1.27) 78,1.27 78,7.27 78,13 78,45 78,51.73 ccw(c76.73,51.73) 76.73,53 76,53 1,53 ccw(c1,52) 0,52 0,45 0,19 0,12 0,7.27 0,1.27

## Text inside footprints (layer, text, board x,y; h text height)
U2: Mechanical 13 "*" at 39.737,9.457 h1.27 r180